# Altium PCB LBP_PCBv1.PcbDoc
Units mm, origin at the board's own origin, x right, y up, seen from the top; angles counter-clockwise.
Board outline 82.5 x 70 mm, 2 copper layers (Top Layer, Bottom Layer), stack 2 mm thick; 26 components, 17 nets, 66 pads, 0 vias.
Unrouted connection lines stored in the file: 3.
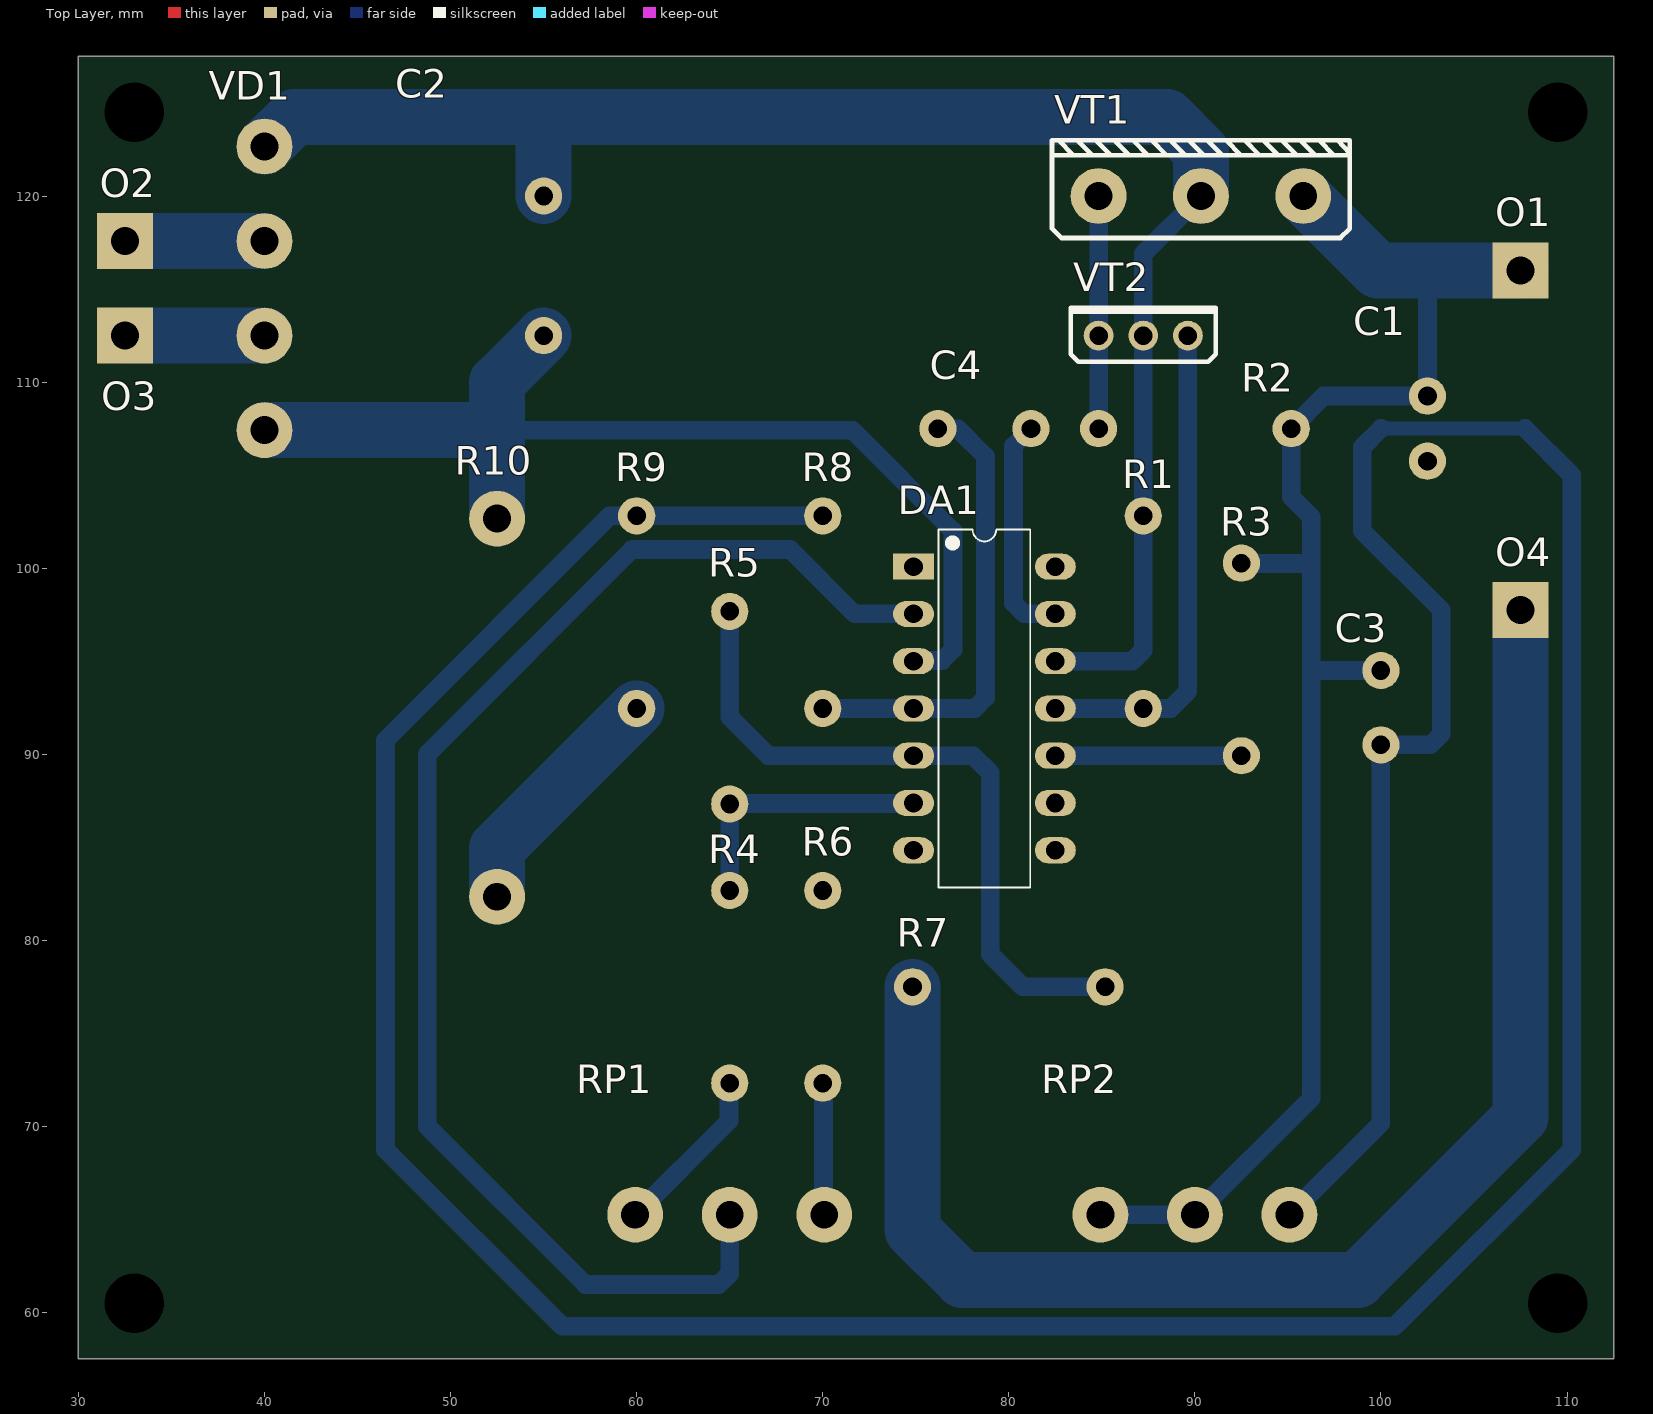
[diagram p0: Top Layer view]
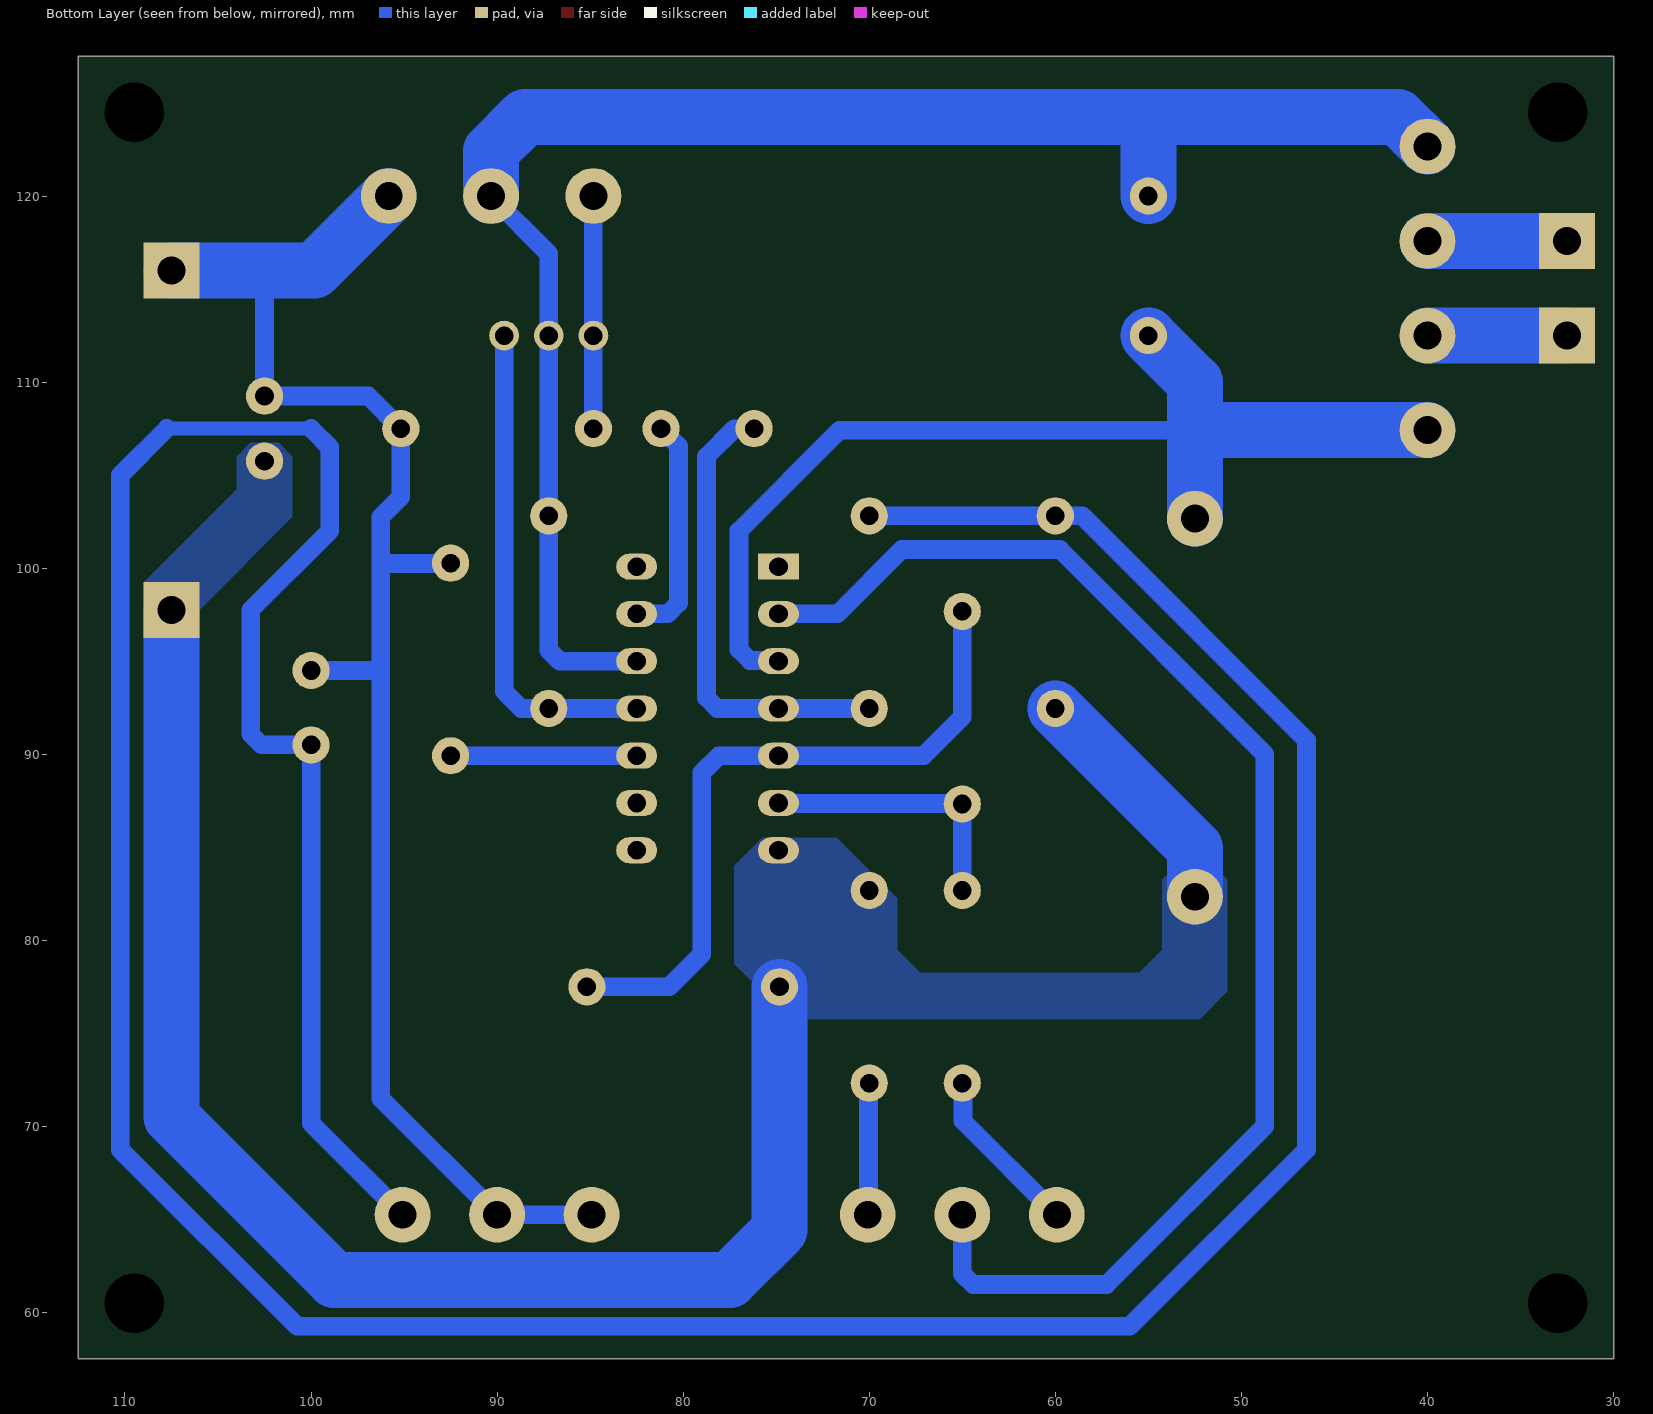
[diagram p1: Bottom Layer view, seen from below]
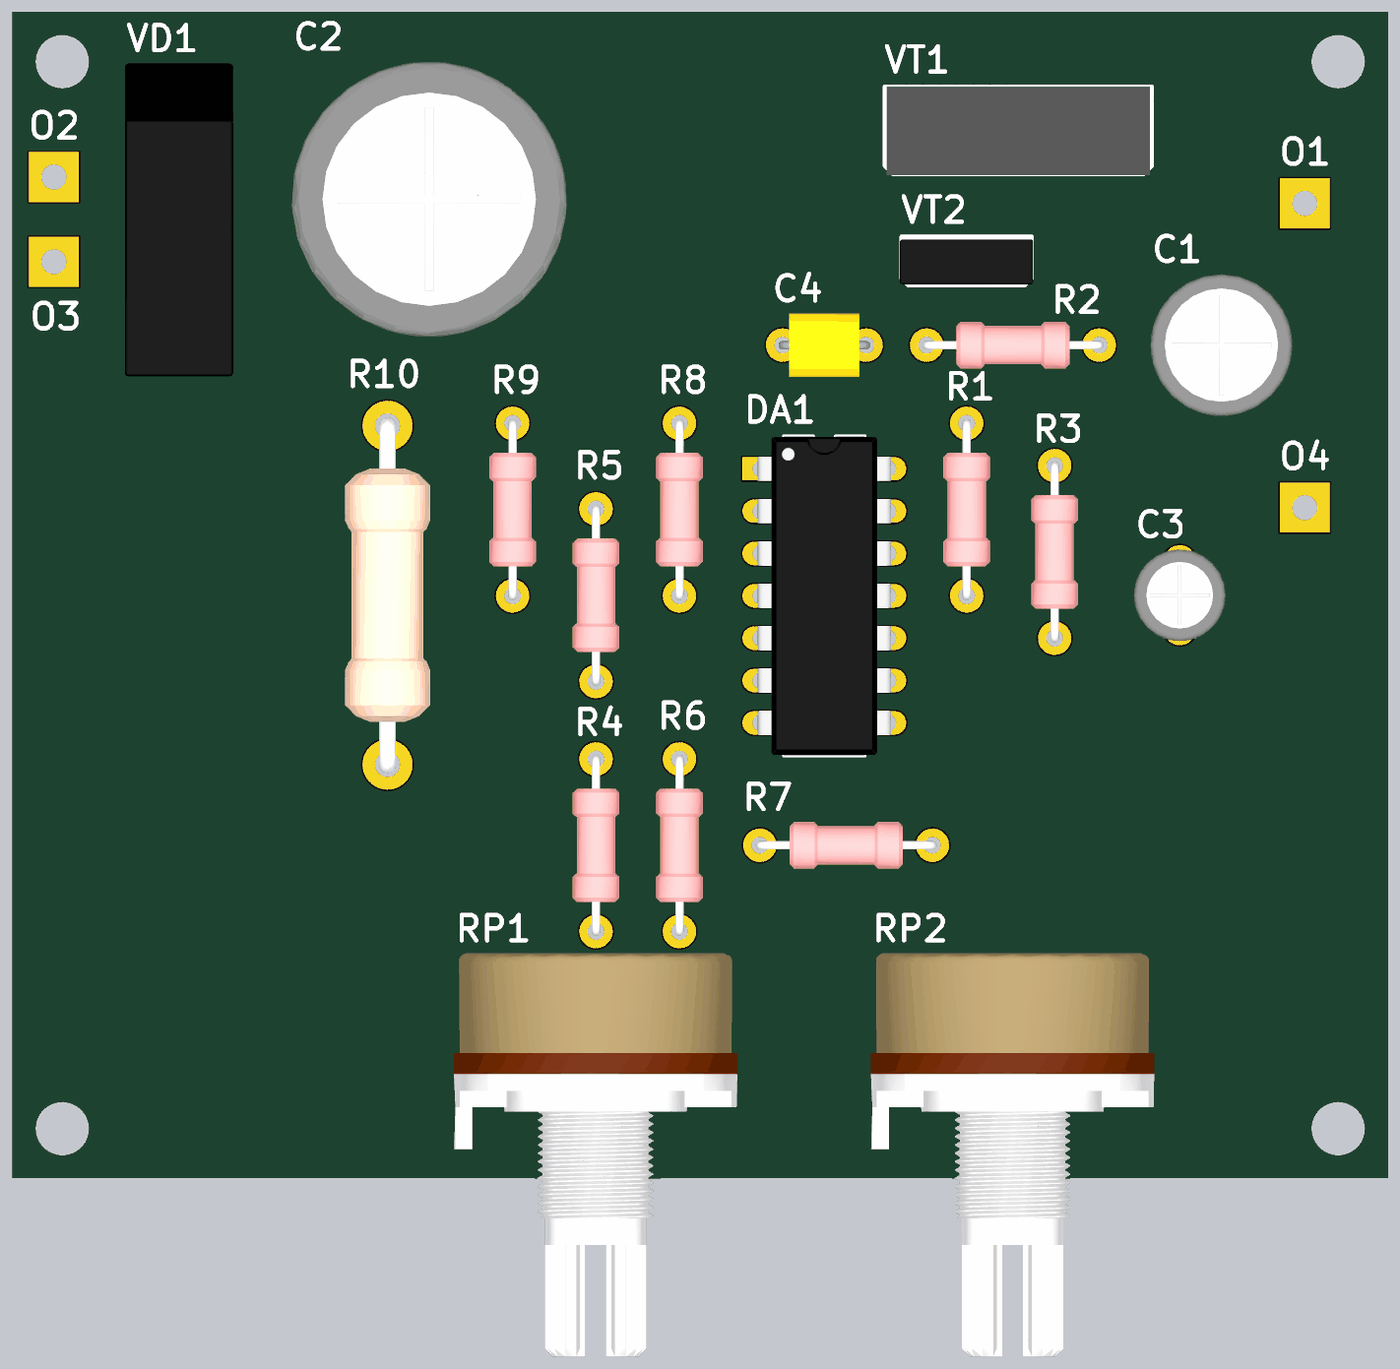
[diagram p2: 3D render of the assembled board from above, using the file's embedded part models]

## Layer stack, top to bottom
Top Layer: signal copper 0.035
Dielectric 1: dielectric 1.93, FR-4, Dk 4.8
Bottom Layer: signal copper 0.035

## Board outline
30,57.5 30,127.5 112.5,127.5 112.5,57.5

## Design rules (kind name [scope] priority, off if disabled: settings)
Clearance Clearance_2 [InNamedPolygon('NETC1_2_L02_P000') Or InNamedPolygon('NETC1_2_L02_P001')] p1: gap=0.254 ignorepadtopadclearanceinfootprint=FALSE except(0: Arc-Arc Arc-Track Arc-Hole Track-Track Track-Hole SMDPad-Hole THPad-Hole Via-Hole Fill-Hole Poly-Hole Region-Hole Text-Hole)
Clearance Clearance_1 [InNamedPolygon('NETC1_2_L02_P000') Or InNamedPolygon('NETC1_2_L02_P001')] p2: gap=0.254 ignorepadtopadclearanceinfootprint=FALSE except(0: Arc-Hole Track-Hole SMDPad-Hole THPad-Hole Via-Hole Fill-Hole Poly-Hole Region-Hole Text-Hole)
Clearance [All] p3: gap=0.254 ignorepadtopadclearanceinfootprint=FALSE except(0: Arc-Hole Track-Hole SMDPad-Hole THPad-Hole Via-Hole Fill-Hole Poly-Hole Region-Hole Text-Hole)
Height [All] p1: minheight=0 maxheight=50 prefheight=12.7
PolygonConnect PolygonConnect_2 [All vs IsNamedPolygon('NETC1_2_L02_P000') Or IsNamedPolygon('NETC1_2_L02_P001')] p1: connectstyle=Direct reliefconductorwidth=0.254 reliefentries=4 polygonreliefangle="90 Angle" airgapwidth=0.254
PolygonConnect PolygonConnect_1 [All vs IsNamedPolygon('NETC1_2_L02_P000')] p2: connectstyle=Direct reliefconductorwidth=0.254 reliefentries=4 polygonreliefangle="90 Angle" airgapwidth=0.254
PolygonConnect [All] p3: connectstyle=Relief reliefconductorwidth=0.254 reliefentries=4 polygonreliefangle="90 Angle" airgapwidth=0.254
RoutingVias [All] p1: holewidth=0.711 width=1.27 viastyle="Through Hole" minholewidth=0.711 minwidth=1.27 maxholewidth=0.711 maxwidth=1.27
SolderMaskExpansion [All] p1: expansion=0.102 istentingtop=FALSE
Width [All] p1: maxlimit=3 minlimit=0.254 preferedwidth=0.254
29 further rules are at their usual default settings.

## Classes and differential pairs
component class Э3: C1 C2 C3 C4 DA1 O1 O2 O3 O4 R1 R2 R3 R4 R6 R8 RP1 RP2 VD1 VT1 VT2

## Components (designator, comment, footprint, x,y, rotation, side; value= is the part's Value field where it differs from the comment)
C1 "100uF 50V" "ECAP 100uF 50V" 102.5,107.5 r270 top
C2 "4700uF 50V" "ECAP 4700uF 50V" 55,116.25 r270 top
C3 "2.2uF 50V" "ECAP 2.2uF 50V" 100,92.5 r270 top
C4 "220pF" "CAP 220pF" 75.94,107.5 r0 top
DA1 "LM723CN" Dip14 74.88,100.08 r0 top
O1 "+OUT VDC" "Connection Pad" 107.494,116 r90 top
O2 "24VAC" "Connection Pad" 32.5,117.58 r90 top
O3 "24VAC" "Connection Pad" 32.5,112.5 r0 top
O4 "-OUT VDC" "Connection Pad" 107.494,97.75 r0 top
R1 "220" "Res 0.125W" 87.225,97.635 r270 top
R2 "68" "Res 0.125W" 90,107.5 r180 top
R3 "220" "Res 0.125W" 92.5,95.095 r270 top
R4 "4.7k" "Res 0.125W" 65,77.5 r270 top
R5 "10k" "Res 0.125W" 65,92.5 r270 top
R6 "68" "Res 0.125W" 70,77.5 r270 top
R7 "1.5k" "Res 0.125W" 80,77.5 r0 top
R8 "680" "Res 0.125W" 70,97.635 r270 top
R9 "330" "Res 0.125W" 60,97.635 r90 top
R10 "0.2" "Res 2W" 52.5,92.5 r270 top
RP1 "500" 16K1 65,65.25 r0 top
RP2 "10k" 16K1 90,65.25 r0 top
VD1 "KBL404" KBL 40,122.66 r270 top
VT1 "TIP3055" TO-247 90.325,120 r0 top
VT2 "BD140" TO-126 87.225,112.5 r0 top
ZBOAS144690462 "Слой 2" "BOASVIEWlayer:Bottom Layer:2:1:32:1" 36.75,2297.75 r0 top (schematic designator fewf)
ZBOAS714598503 "Comment" "BOASVIEWdrill:Таблица отверстий:0:0:0:0" 181.5,2502 r0 top

## Footprints (in the part's own frame and the unit in brackets; to place one, negate y for a bottom-side part, rotate by r counter-clockwise, add the part's x,y. Pads: shape width x height; smd on the part's side, far side on the other; paste and mask are expansions set on the pad)
16K1 [mm]
  round 3 hole 1.5: 1(5.08,0) 2(0,0) 3(-5.08,0)
  body extent -8.52,-18.42 8.47,5.77, height 23.5
"BOASVIEWdrill:Таблица отверстий:0:0:0:0" [mm]
"BOASVIEWlayer:Bottom Layer:2:1:32:1" [mm]
"CAP 220pF" [mm]
  round 2 hole 1: 1(0.25,0) 2(5.25,0)
  body extent 0,-1.91 5.5,1.91, height 6.2
"Connection Pad" [mm]
  rect 3x3 hole 1.5: 1(0,0)
Dip14 [mm]
  rect 2.2x1.4 hole 1: 1(0,0)
  oval 2.2x1.4 hole 1: 2(0,-2.54) 3(0,-5.08) 4(0,-7.62) 5(0,-10.16) 6(0,-12.7) 7(0,-15.24) 8(7.62,-15.24) 9(7.62,-12.7) 10(7.62,-10.16) 11(7.62,-7.62) 12(7.62,-5.08) 13(7.62,-2.54) 14(7.62,0)
  silkscreen extent 1.35,-17.24 6.27,2, body extent -0.19,-17.15 7.81,1.9, height 4.01
"ECAP 2.2uF 50V" [mm]
  round 2 hole 1: 1(-2,0) 2(2,0)
  body extent -2.75,-2.75 2.75,2.75, height 14
"ECAP 100uF 50V" [mm]
  round 2 hole 1: 1(-1.75,0) 2(1.75,0)
  body extent -4.25,-4.25 4.25,4.25, height 14
"ECAP 4700uF 50V" [mm]
  round 2 hole 1: 1(-3.75,0) 2(3.75,0)
  body extent -8.25,-8.24 8.25,8.25, height 39.5
KBL [mm]
  round 3 hole 1.5: 1(0,0) 2(5.08,0) 3(10.16,0) 4(15.24,0)
  body extent -1.75,-3.25 17.05,3.25, height 32
"Res 0.125W" [mm]
  round 2 hole 1: 1(-5.175,0) 2(5.175,0)
  body extent -5.42,-1.4 5.42,1.4, height 3.89
"Res 2W" [mm]
  round 3 hole 1.5: 1(-10.16,0) 2(10.16,0)
  body extent -10.66,-2.55 10.66,2.55, height 6.25
TO-126 [mm]
  round 1.6 hole 1: 1(2.4,0) 2(0,0) 3(-2.4,0)
  silkscreen extent -3.9,-1.4 3.9,1.5, body extent -4,-1.35 4,1.35, height 15
TO-247 [mm]
  round 3 hole 1.5: 1(-5.5,0) 2(0,0) 3(5.5,0)
  silkscreen extent -8,-2.25 8,3, body extent -7.9,-2.3 7.9,3, height 26.1

## Part data
C1: library part "ECAP 100uF 50V", "Конденсатор электролитический / B41851A6107M000 100мкФ 50В 20% / (EPCOS, Германия)"
C2: library part "ECAP 4700uF 50V", "Конденсатор электролитический / B41252C6478M000 4700мкФ 50В 20% / (EPCOS, Германия)"
C3: library part "ECAP 2.2uF 50V", "Конденсатор электролитический / TKR2R2M2VE11 2.2мкФ 50В 20% / (Jamicon, США)"
C4: library part "CAP 220pF", "Конденсатор керамический / RDE5C1H221J 220пФ 50В 10% / (Murata Electronics, Япония)"
DA1: "Регулятор напряжения / LM723CN 2В...37В 150мА / (STMicroelectronics, Франция)"
O1 O2 O3 O4: library part "Connection Pad"
R1 R3: library part "Res 0.125W", "Резистор углеродистый / 0.125Вт 220 Ом 5% / (Тайвань)"
R2 R6: library part "Res 0.125W", "Резистор углеродистый / 0.125Вт 68 Ом 5% / (Тайвань)"
R4: library part "Res 0.125W", "Резистор углеродистый / 0.125Вт 4.7 кОм 5% / (Тайвань)"
R5: library part "Res 0.125W", "Резистор углеродистый / 0.125Вт 10 кОм 5% / (Тайвань)"
R7: library part "Res 0.125W", "Резистор углеродистый / 0.125Вт 1.5 кОм 5% / (Тайвань)"
R8: library part "Res 0.125W", "Резистор углеродистый / 0.125Вт 680 Ом 5% / (Тайвань)"
R9: library part "Res 0.125W", "Резистор углеродистый / 0.125Вт  330 Ом 5% / (Тайвань)"
R10: library part "Res 2W", "Резистор углеродистый / 2Вт 0.2 Ом 5% / (Тайвань)"
RP1: library part Potentiometer, "Потенциометр / 16K1 0.2Вт 500 Ом 10%"
RP2: library part Potentiometer, "Потенциометр / 16K1 0.2Вт 10 кОм 10%"
VD1: "Диодный мост / KDL404 4А 400В"
VT1: "Транзистор NPN / TIP3055 60В 15А TO-247 / (STMicroelectronics, Франция)"
VT2: "Транзистор PNP / BD140 80В 1.5А TO-126 / (STMicroelectronics, Франция)"

## Free pads (board coordinates)
  round 0 hole 3.2 unplated: 2(33,60.5) 2(33,124.5) 2(109.5,60.5) 2(109.5,124.5)

## Nets (pads, with @x,y where several pads share a name; then routed paths per layer and width w, separated by ;. In a path a pad name is that pad's centre, name@x,y a point inside that pad or via, vN(x,y) a via of type N, cw(c..) or ccw(c..) an arc to the next point about the centre after c; other vN are vias at no path point)
NetC1_1: C1.1 C3.1 O1.1 R2.1 R3.1 RP2.2 RP2.3 VT1.3 | length 86
  Bottom Layer w1: RP2.3 RP2.2 96.25,71.5 96.25,94.5 ; R3.1@92.52,100.25 96.25,100.25 ; C3.1 96.25,94.5 ; 102.5,116 C1.1 96.925,109.25 R2.1 95.175,103.825 96.25,102.75 96.25,100.25 ; 96.25,94.5 96.25,100.25
  Bottom Layer w3: VT1.3 99.825,116 102.5,116 O1.1
NetC1_2: C1.2 DA1.7 O4.1 R6.1 R7.1 R9.1 R10.2 | length 91
  Bottom Layer w3: R10.2 52.5,84.96 R9.1 ; R7.1 74.825,64.425 77.5,61.75 98.75,61.75 107.494,70.494 O4.1
NetC2_1: C2.1 DA1.12 R1.1 VD1.1 VT1.2 VT2.2 | length 89.1
  Bottom Layer w1: DA1.12 86.639,95 87.225,95.586 R1.1 VT2.2 87.225,116.9 VT1.2
  Bottom Layer w3: VD1.1 41.59,124.25 55,124.25 ; C2.1 55,124.25 ; VT1.2 90.325,122.425 88.5,124.25 55,124.25
NetC2_2: C2.2 DA1.3 R10.1 VD1.4 | length 58.9
  Bottom Layer w1: 52.5,107.42 71.58,107.42 77,102 77,95.624 76.414,95.038 74.918,95.038 DA1.3
  Bottom Layer w3: VD1.4 52.5,107.42 ; R10.1 52.5,107.42 ; C2.2 52.5,110 52.5,107.42
NetC3_2: C3.2 R8.1 R9.2 RP2.1 | length 219
  Bottom Layer w0.75: 100.004,107.504 107.746,107.504
  Bottom Layer w1: R8.1 R9.2 58.56,102.81 46.5,90.75 46.5,68.75 56,59.25 100.75,59.25 110.25,68.75 110.25,105 107.746,107.504 ; RP2.1 100,70.17 C3.2 102.664,90.5 103.25,91.086 103.25,97.75 99,102 99,106.5 100.004,107.504
NetC4_1: C4.1 DA1.4 R8.2 | length 25.1
  Bottom Layer w1: R8.2 DA1.4 78.164,92.46 78.75,93.046 78.75,106 77.25,107.5 C4.1
NetC4_2: C4.2 DA1.13 | length 12.3
  Bottom Layer w1: C4.2 81.186,107.5 80.25,106.564 80.25,98.126 80.836,97.54 DA1.13
NetDA1_2: DA1.2 RP1.2 | length 75.3
  Bottom Layer w1: RP1.2 65,62.086 64.414,61.5 57.25,61.5 48.75,70 48.75,90 59.75,101 68.25,101 71.71,97.54 DA1.2
NetDA1_5: DA1.5 R5.1 R7.2 | length 37.6
  Bottom Layer w1: R5.1 65,92 67.08,89.92 DA1.5 78.08,89.92 79,89 79,79.25 80.75,77.5 R7.2
NetDA1_6: DA1.6 R4.1 R5.2 | length 14.6
  Bottom Layer w1: R4.1 R5.2 65.028,87.352 74.852,87.352 DA1.6
NetDA1_10: DA1.10 R3.2 | length 10
  Bottom Layer w1: DA1.10 R3.2
NetDA1_11: DA1.11 R1.2 VT2.1 | length 26.6
  Bottom Layer w1: DA1.11 88.71,92.46 89.625,93.375 VT2.1
NetO2_1: O2.1 VD1.2 | length 7.5
  Bottom Layer w3: O2.1 VD1.2
NetO3_1: O3.1 VD1.3 | length 7.5
  Bottom Layer w3: O3.1 VD1.3
NetR2_2: R2.2 VT1.1 VT2.3 | length 12.5
  Bottom Layer w1: R2.2 VT2.3 VT1.1
NetR4_2: R4.2 RP1.3 | length 9.2
  Bottom Layer w1: RP1.3 64.962,70.292 64.962,72.287 R4.2
NetR6_2: R6.2 RP1.1 | length 7.1
  Bottom Layer w1: R6.2 70.038,72.287 70.038,65.292 RP1.1
pads on no net: DA1.1 DA1.8 DA1.9 DA1.14

## Polygon pours and split planes (outlines as drawn)
NetC1_2 on Bottom Layer "NETC1_2_L02_P001" (solid, pour order 1): 106,96.25 106,97.75 101,102.75 101,105.318 101,106 101.75,106.75 103.25,106.75 104,106 104,104.25 109,99.25 109,96.25
NetC1_2 on Bottom Layer "NETC1_2_L02_P000" (solid, pour order 0): 52.25,75.75 50.75,77.25 50.75,83.25 51.5,84 53.5,84 54.25,83.25 54.25,79.5 55.5,78.25 67.25,78.25 68.5,79.5 68.5,82.25 71.75,85.5 75.75,85.5 77.25,84 77.25,78.75 74.25,75.75 68.5,75.75
no net on Mechanical 8 "NONET_L02_P-001" (hatched 90Degree grid 2.5 track 0.1): 30,127.5 112.5,127.5 112.5,57.5 30,57.5

## Silkscreen, mask and mechanical layers (free items; w line width, h text height)
Mechanical 1:
  the board outline again, w0.4
Mechanical 7:
  text "BOASFORMAT|А3|1|0|883070867|165354330|1000000000|2:1|" at 0,2540 h0
  text "SET2|Superlayer=MechanicalLayer7|Wsuperlayer=MechanicalLayer8|Layergrid=MechanicalLayer9|Werase=MechanicalLayer11|Layermark=MechanicalLayer12|Layerstamp=MechanicalLayer13|Thinline=0,18|Basicline=0,6|Gridline=0,18|Boardline=0,6|Contourpolygonline=0,6|PcbGridStep=1|PcbGridNumbering=False|PcbGridCleareanceAtView=0|PcbGridNumberEach=l4|PcbGridLineEach=l2|PcbGridCountSecondaryStrip=1|PcbGridEnabledStrip=True|PcbGridHorizontal90=False|PcbGridWhiteAreaBeforeText=True|PcbSignalGridEnabled=True|PcbSignalShowBukva=True|RealSignalLayerNames=False|PcbGridEnabledBothSide=False|PcbPolarGridEnabled=False|PcbPolarGridAngleStep=10|PcbPolarGridRadialStep=10|PcbPolarGridCenterPcbGrid=False|SilkShowPad=True|SilkViewName=Слой маркировки|SilkShowHole=True|SilkShowAxis=True|SilkShowBukva=True|SilkShowGrid=False|SolderShowGrid=False|SolderViewName=Слой маски|SolderShowAxis=False|SolderShowBukva=False|MainViewShowGrid=False|MainViewMinDiameterHoles=2|MainViewUseShapesDrill=False|ShowBukvaOnSboky=True|ShowBukvaViews=True|Density=2,2|CustomHoleSizeFactor=1|TableName=Таблица 1|RazrezWidth=100|RealLayerNames=False|RazrezShowBukva=False|RazrezBukva=В-В|Sher=Rz 160|Asstoplayer=MechanicalLayer1|Asstoplayer2=None|Assbottomlayer=MechanicalLayer2|Assbottomlayer2=None|AssMinDiameterHoles=2|AssDim=False|AssMech=False|AssSilk=False|AssComponentSilk=False|AssFreeSilk=False|AssSmdPads=False|AssGridEnable=False|AssShowBukva=True|Mirror=Horisontal|PcbGridFontSize=5|PcbGridCenterZero=False|TTStampDistance=12|MainFontSize=5|PolyShtrihEnable=True|RegionShtrihEnable=False|PolyStep=2|PcbDrillDrawingGridEnabled=False|PcbDrillDrawingViewName=Слой сверловки|PcbDrillDrawingShowBukva=False|PcbDrillDrawingShowAxis=False|PcbSignalLayersUseDrill=False|PcbSignalLayersUseWhiteHoles=True|PcbSignalLayersUseShapesDrill=False|PcbSignalLayersShowAxis=False" at 0,0.025 h0
  text "BOASVIADRILLTABLE:" at 0,0 h0
  text "2BOASDRILLTABLE:circle0001,236220,Да,20,True,|circle0010,275591,Да,2,True,|circle0011,314961,Да,18,True,|circle0100,393701,Да,3,True,|circle0101,590551,Да,23,True," at 0,0 h0
Mechanical 13:
  lines w0.18: 230,2253 295,2253 ; 230,2258 295,2258 ; 230,2263 295,2263 ; 230,2268 295,2268 ; 230,2273 295,2273 ; 230,2288 295,2288 ; 230,2293 295,2293 ; 230,2298 295,2298 ; 369.96,2268 369.96,2283 ; 374.98,2268 374.98,2283 ; 391.7,2522.1 394.8,2516.7 400.4,2526.5 ; 0,2243 420,2243 420,2540 0,2540 0,2243
  lines w0.6: 8,2273 20,2273 ; 8,2308 20,2308 ; 8,2333 20,2333 ; 8,2358 20,2358 ; 8,2475 20,2475 ; 13,2248 13,2393 ; 13,2415 13,2535 ; 20,2393 8,2393 8,2248 20,2248 ; 20,2415 8,2415 8,2535 20,2535 ; 20,2521 90,2521 90,2535 ; 230,2248 230,2303 415,2303 ; 230,2278 295,2278 ; 230,2283 295,2283 ; 237,2278 237,2303 ; 247,2248 247,2303 ; 270,2248 270,2303 ; 285,2248 285,2303 ; 295,2248 295,2303 415,2303 ; 295,2263 365,2263 415,2263 ; 295,2288 415,2288 ; 352,2524 357,2515 364.6,2529 ; 364.7,2529 407,2529 ; 365,2248 365,2288 ; 365,2268 415,2268 ; 365,2283 380,2283 415,2283 ; 380,2268 380,2288 ; 385.57,2263 385.57,2268 ; 397,2268 397,2288 ; 415,2311 415,2303 ; 20,2248 415,2248 415,2535 20,2535 ; 20,2248 20,2535
  text "Rz 160" at 364.7,2516.7 h10.75
  text "(" at 388,2516.7 h10.75
  text ")" at 399,2516.7 h10.75
  text "Перв. примен." at 12.194,2491.232 h5.38 r90
  text "Справ. №" at 12.194,2435.033 h5.38 r90
  text "Подп. и дата" at 12.194,2361.891 h5.38 r90
  text "Инв. № дубл." at 12.194,2332.399 h5.38 r90
  text "Взам. инв. №" at 12.194,2307.346 h5.38 r90
  text "Лит." at 368.295,2283.806 h5.38
  text "Масса" at 382.859,2283.806 h5.38
  text "Масштаб" at 397.002,2283.806 h5.38
  text "Изм." at 229.542,2278.806 h5.38
  text "Лист" at 237.024,2278.806 h5.38
  text "№ докум." at 249.51,2278.806 h5.38
  text "Подп." at 272.457,2278.806 h5.38
  text "Дата" at 284.556,2278.806 h5.38
  text "Подп. и дата" at 12.194,2277.391 h5.38 r90
  text "Разраб." at 230.533,2273.771 h5.38
  text "5 г" at 383.776,2273.079 h7.68
  text "2:1" at 402.111,2273.079 h7.68
  text "Пров." at 230.533,2268.771 h5.38
  text "Т.контр." at 230.533,2263.771 h5.38
  text "Лист" at 366.442,2263.771 h5.38
  text "Листов" at 387.485,2263.771 h5.38
  text "1" at 407.306,2263.771 h5.38
  text "Н.контр." at 230.533,2253.771 h5.23
  text "Утв." at 230.533,2248.771 h5.38
  text "Инв. № подл." at 12.194,2247.399 h5.38 r90
  text "Копировал" at 305.533,2243.771 h5.38
  text "Формат А3" at 383.401,2243.771 h5.38

## Text inside footprints (layer, text, board x,y; h text height)
ZBOAS144690462: Mechanical 7 "80" at 192.676,2287.617 h8.75; Mechanical 7 "76" at 185.303,2287.617 h8.75; Mechanical 7 "72" at 177.218,2287.617 h8.75; Mechanical 7 "68" at 168.757,2287.617 h8.75; Mechanical 7 "64" at 161.117,2287.617 h8.75; Mechanical 7 "60" at 152.874,2287.617 h8.75; Mechanical 7 "56" at 144.894,2287.617 h8.75; Mechanical 7 "52" at 136.809,2287.617 h8.75; Mechanical 7 "48" at 128.538,2287.617 h8.75; Mechanical 7 "44" at 120.898,2287.617 h8.75; Mechanical 7 "40" at 112.655,2287.617 h8.75; Mechanical 7 "36" at 104.882,2287.617 h8.75; Mechanical 7 "32" at 96.797,2287.617 h8.75; Mechanical 7 "28" at 88.619,2287.617 h8.75; Mechanical 7 "24" at 80.979,2287.617 h8.75; Mechanical 7 "20" at 72.736,2287.617 h8.75; Mechanical 7 "16" at 65.992,2287.617 h8.75; Mechanical 7 "12" at 57.907,2287.617 h8.75; Mechanical 7 "8" at 50.745,2287.617 h8.75; Mechanical 7 "4" at 43.085,2287.617 h8.75; Mechanical 7 "0" at 34.802,2287.617 h8.75; Mechanical 7 "68" at 24.763,2430.992 h8.75; Mechanical 7 "64" at 25.484,2422.992 h8.75; Mechanical 7 "60" at 24.998,2414.992 h8.75; Mechanical 7 "56" at 25.039,2406.992 h8.75; Mechanical 7 "52" at 24.869,2398.992 h8.75; Mechanical 7 "48" at 24.326,2390.992 h8.75; Mechanical 7 "44" at 25.047,2382.992 h8.75; Mechanical 7 "40" at 24.561,2374.992 h8.75; Mechanical 7 "36" at 25.014,2366.992 h8.75; Mechanical 7 "32" at 24.844,2358.992 h8.75; Mechanical 7 "28" at 24.488,2350.992 h8.75; Mechanical 7 "24" at 25.209,2342.992 h8.75; Mechanical 7 "20" at 24.723,2334.992 h8.75; Mechanical 7 "16" at 27.234,2326.992 h8.75; Mechanical 7 "12" at 27.064,2318.992 h8.75; Mechanical 7 "8" at 28.74,2310.992 h8.75; Mechanical 7 "4" at 29.421,2302.992 h8.75; Mechanical 7 "0" at 28.854,2294.992 h8.75
ZBOAS714598503: Mechanical 12 "3,0" at 311.857,2447.876 h7.68; Mechanical 12 "Да" at 368.384,2447.876 h7.68; Mechanical 12 "1,5" at 256.478,2447.876 h7.68; Mechanical 12 "23" at 401.334,2447.876 h7.68; Mechanical 12 "1,6" at 312.952,2456.579 h7.68; Mechanical 12 "Да" at 368.384,2456.579 h7.68; Mechanical 12 "1" at 258.864,2456.579 h7.68; Mechanical 12 "3" at 403.019,2456.579 h7.68; Mechanical 12 "1,6" at 312.952,2464.579 h7.68; Mechanical 12 "Да" at 368.384,2464.579 h7.68; Mechanical 12 "0,8" at 255.647,2464.579 h7.68; Mechanical 12 "18" at 402.183,2464.579 h7.68; Mechanical 12 "1,4" at 313.045,2472.579 h7.68; Mechanical 12 "Да" at 368.384,2472.579 h7.68; Mechanical 12 "0,7" at 255.618,2472.579 h7.68; Mechanical 12 "2" at 403.029,2472.579 h7.68; Mechanical 12 "1,2" at 312.877,2480.579 h7.68; Mechanical 12 "Да" at 368.384,2480.579 h7.68; Mechanical 12 "0,6" at 255.87,2480.579 h7.68; Mechanical 12 "20" at 401.305,2480.579 h7.68; Mechanical 12 "отв." at 399.179,2488.329 h7.68; Mechanical 12 "Кол." at 399.3,2495.829 h7.68; Mechanical 12 "металлизации" at 351.325,2488.329 h7.68; Mechanical 12 "Наличие" at 360.422,2495.829 h7.68; Mechanical 12 "площадки, мм" at 295.921,2488.329 h7.68; Mechanical 12 "Диаметр контактной" at 283.857,2495.829 h7.68; Mechanical 12 "мм" at 255.988,2488.329 h7.68; Mechanical 12 "Диаметр отв.," at 238.854,2495.829 h7.68; Mechanical 12 "обозначение отв." at 184,2488.329 h7.68; Mechanical 12 "Условное" at 196.324,2495.829 h7.68; Mechanical 12 "Таблица 1" at 181.5,2503.5 h7.68